# Altium PCB PCB1 (1).PcbDoc
Units mm, origin at the board's own origin, x right, y up, seen from the top; angles counter-clockwise.
Board outline 48 x 32 mm, 2 copper layers (Top Layer, Bottom Layer); 14 components, 7 nets, 32 pads, 0 vias.
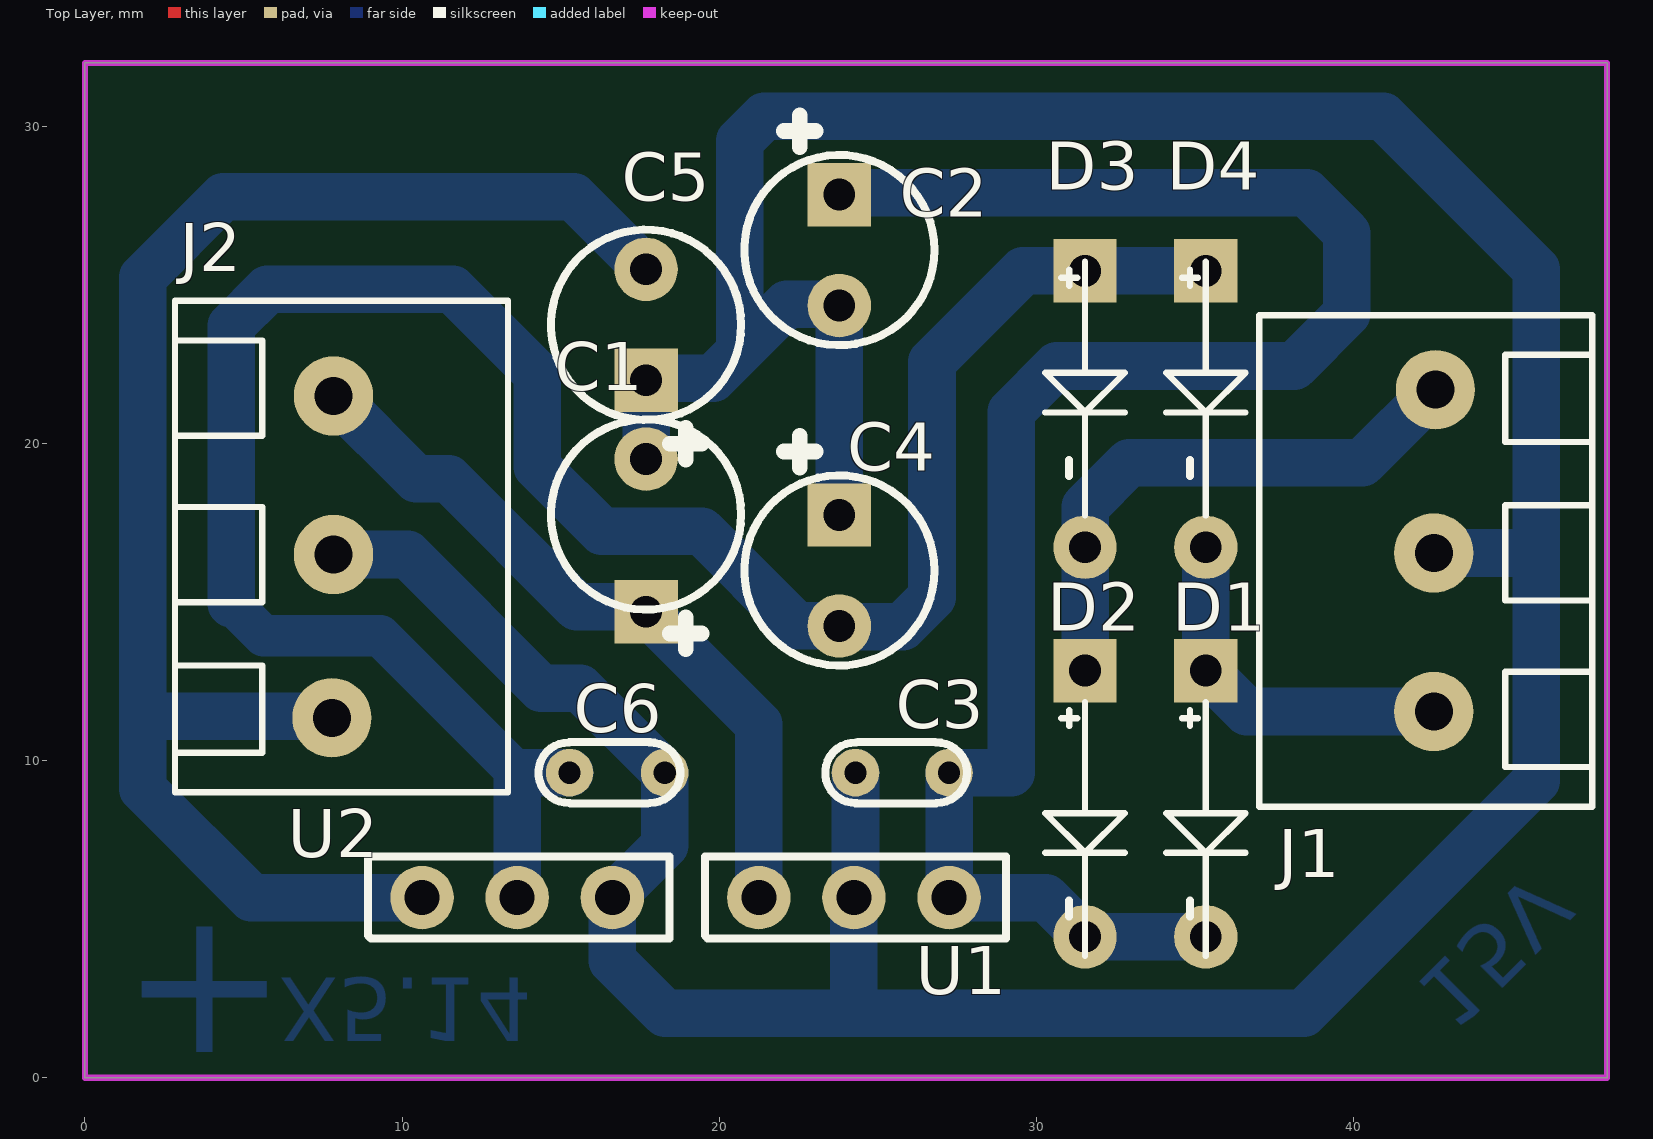
[diagram p0: Top Layer view]
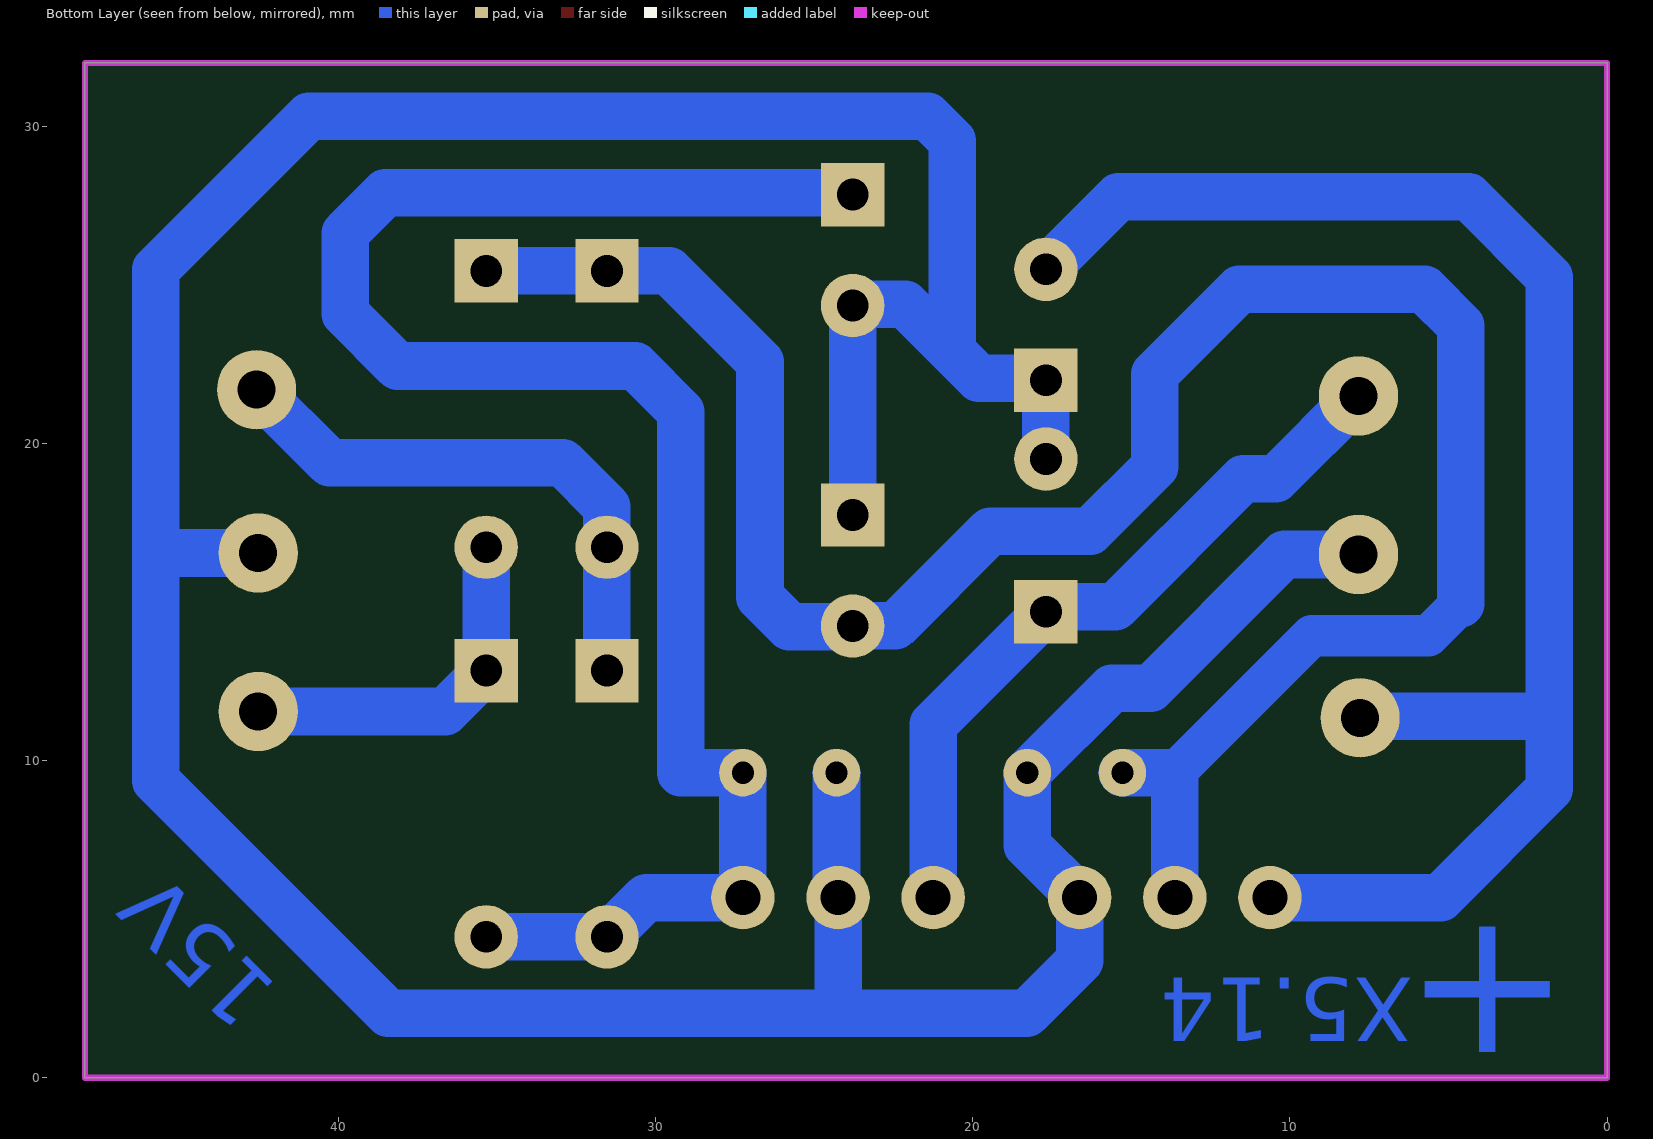
[diagram p1: Bottom Layer view, seen from below]
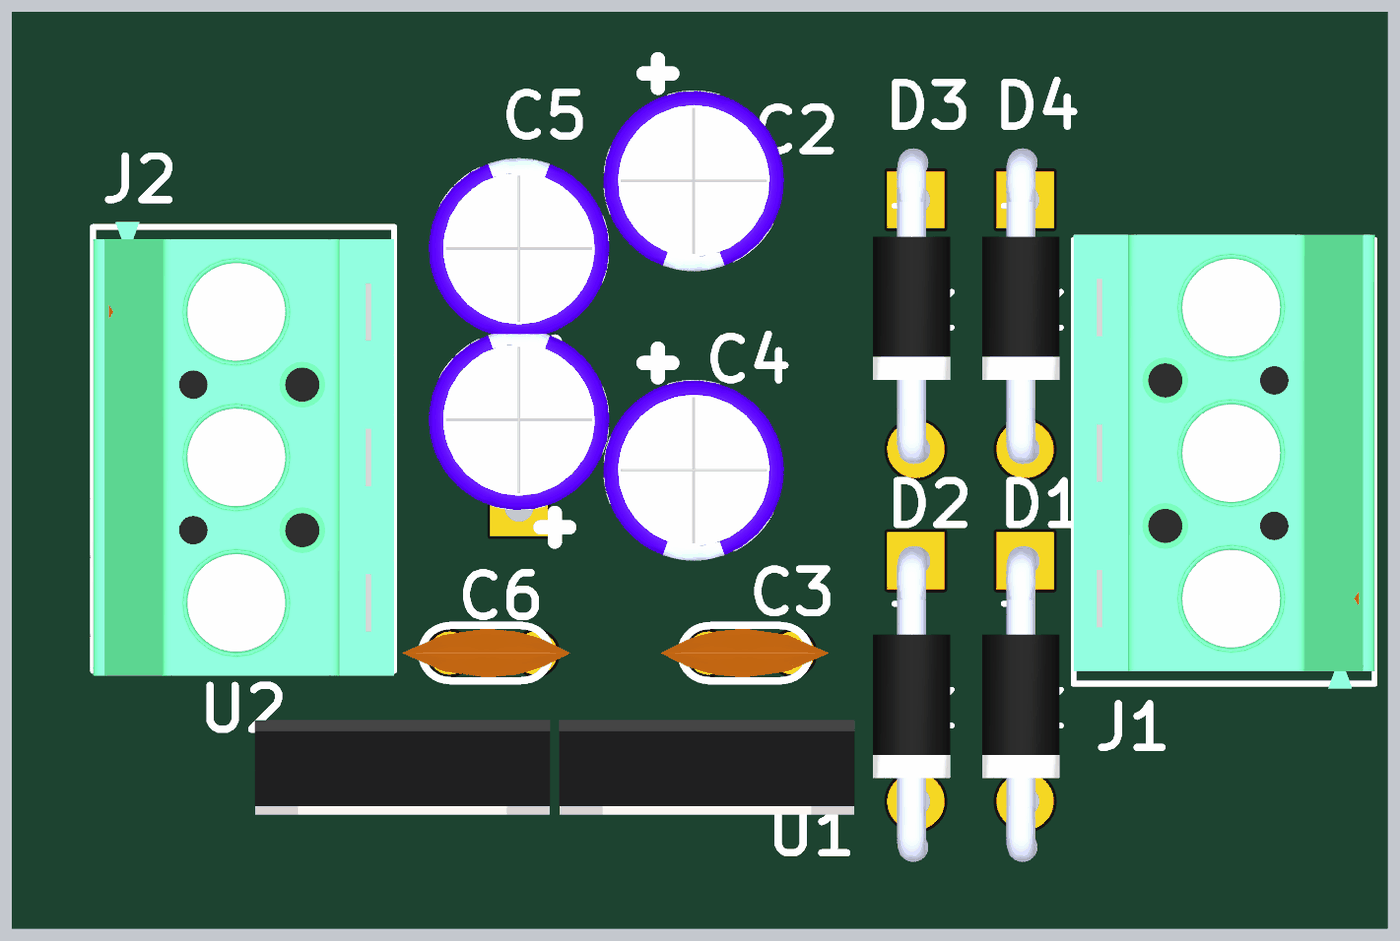
[diagram p2: 3D render of the assembled board from above, using the file's embedded part models]

## Layer stack, top to bottom
Top Solder: solder mask 0.0102, Solder Resist, Dk 3.5
Top Layer: signal copper 0.0356
Dielectric 1: dielectric 0.32, FR-4, Dk 4.8
Bottom Layer: signal copper 0.0356
Bottom Solder: solder mask 0.0102, Solder Resist, Dk 3.5

## Board outline
0,0 0,32 48,32 48,0

## Design rules (kind name [scope] priority, off if disabled: settings)
Clearance [All] p1: gap=0.5 ignorepadtopadclearanceinfootprint=FALSE except(0: Arc-Hole Track-Hole SMDPad-Hole THPad-Hole Via-Hole Fill-Hole Poly-Hole Region-Hole Text-Hole)
PolygonConnect [All] p1: connectstyle=Relief reliefconductorwidth=0.254 reliefentries=4 polygonreliefangle="90 Angle" airgapwidth=0.254
RoutingVias [All] p1: holewidth=0.711 width=1.27 viastyle="Through Hole" minholewidth=0.711 minwidth=1.27 maxholewidth=0.711 maxwidth=1.27
SolderMaskExpansion [All] p1: expansion=0.102 istentingtop=FALSE
Width [All] p1: maxlimit=5 minlimit=0.5 preferedwidth=5
30 further rules are at their usual default settings.

## Classes and differential pairs
component class Sheet1: C2 C3 C4 C5 D1 D2 D3 D4 J1 U1 U2

## Components (designator, comment, footprint, x,y, rotation, side; value= is the part's Value field where it differs from the comment)
C1 "1 uF" capacitor_elec_t/h_5mm#1 17.695,19.509 r270 top
C2 "4700uF" capacitor_elec_t/h_5mm#2 23.791,24.349 r90 top
C3 "0.1 uF" "tu gom"#1 25.569,9.617 r180 top
C4 "4700uF" capacitor_elec_t/h_5mm#2 23.791,14.245 r90 top
C5 "1uF" capacitor_elec_t/h_5mm#2 17.695,25.492 r270 top
C6 "0.1uF" "tu gom"#2 16.552,9.617 r0 top
D1 "diod_1N4007" diode_t/h_1N4007#1 35.348,7.839 r270 top
D2 "diod_1N4007" diode_t/h_1N4007#1 31.538,7.839 r270 top
D3 "diod_1N4007" diode_t/h_1N4007#2 31.538,21.729 r270 top
D4 "diod_1N4007" diode_t/h_1N4007#2 35.348,21.729 r270 top
J1 "domino_3pin" domino_3pin_5.08mm 42.587,16.697 r90 top
J2 "domino_3pin" domino_3pin_5.08mm 7.789,16.348 r270 top
U1 "LM7815" LM7812 24.251,5.68 r180 top
U2 "LM7915" LM7915 13.631,5.68 r180 top

## Footprints (in the part's own frame and the unit in brackets; to place one, negate y for a bottom-side part, rotate by r counter-clockwise, add the part's x,y. Pads: shape width x height; smd on the part's side, far side on the other; paste and mask are expansions set on the pad)
capacitor_elec_t/h_5mm#1 [mm]
  rect 2x2 hole 1: 1(4.812,0)
  round 2 hole 1: 2(0,0)
  silkscreen extent -1.25,-3 6,3, body extent -1.4,-3.15 4.91,3.15, height 12
capacitor_elec_t/h_5mm#2 [mm]
  rect 2x2 hole 1: 1(3.5,0)
  round 2 hole 1: 2(0,0)
  silkscreen extent -1.25,-3 6,3, body extent -1.4,-3.15 4.91,3.15, height 12
diode_t/h_1N4007#1 [mm]
  rect 2x2 hole 1: 1(-5,0)
  round 2 hole 1: 2(3.398,0)
  silkscreen extent -4,-1.25 4,1.25, body extent -5.51,-1.5 5.51,1.2, height 2.78
diode_t/h_1N4007#2 [mm]
  rect 2x2 hole 1: 1(-3.712,0)
  round 2 hole 1: 2(5,0)
  silkscreen extent -4,-1.25 4,1.25, body extent -5.51,-1.5 5.51,1.2, height 2.78
domino_3pin_5.08mm [mm]
  round 2.5 hole 1.2: 1(-5.15,0.05) 2(-0.15,0.05) 3(5,0)
  silkscreen extent -8.15,-4.95 7.35,5.55, body extent -8.32,-4.95 7.52,5.55, height 19.5
LM7812 [mm]
  round 2 hole 1.1: 1(-3,0) 2(0,0) 3(3,0)
  silkscreen extent -4.8,-1.3 4.7,1.29, body extent -5.15,-1.6 5.15,1.7, height 19.6
LM7915 [mm]
  round 2 hole 1.1: 1(-3,0) 2(0,0) 3(3,0)
  silkscreen extent -4.8,-1.3 4.7,1.29, body extent -5.15,-1.6 5.15,1.7, height 19.6
"tu gom"#1 [mm] "Tu gom mini"
  round 1.5 hole 0.7: 1(-1.682,0) 2(1.27,0)
  silkscreen extent -2.25,-0.97 2.22,0.97, body extent -2.92,-0.85 2.92,0.85, height 6.12
"tu gom"#2 [mm] "Tu gom mini"
  round 1.5 hole 0.7: 1(-1.27,0) 2(1.73,0)
  silkscreen extent -2.25,-0.97 2.22,0.97, body extent -2.92,-0.85 2.92,0.85, height 6.12

## Part data
C1 C2 C4 C5: library part capacitor_electric, "capacitor_electric"
C3 C6: library part "Tu gom 223 50V", "C?m"
U1: library part LM7812, "LM7812"

## Nets (pads, with @x,y where several pads share a name; then routed paths per layer and width w, separated by ;. In a path a pad name is that pad's centre, name@x,y a point inside that pad or via, vN(x,y) a via of type N, cw(c..) or ccw(c..) an arc to the next point about the centre after c; other vN are vias at no path point)
GND: C1.2 C2.2 C3.2 C4.1 C5.1 C6.2 J1.2 J2.2 U1.2 U2.1 | length 130.1
  Bottom Layer w1.5: J2.2 10.179,16.498 14.393,12.284 15.615,12.284 C6.2 18.282,7.331 U2.1 16.631,3.696 18.295,2.032 24.251,2.032 ; C1.2 C5.1 ; C5.1@17.695,22.063 19.812,22.063 22.133,24.384 23.756,24.384 C2.2 C4.1 ; 20.655,22.906 20.655,29.545 21.428,30.318 40.936,30.318 45.762,25.492 45.762,16.221 ; C3.2 24.299,5.68 24.251,5.632 24.251,2.032 ; J1.2 45.436,16.547 45.762,16.221 ; 24.251,2.032 38.431,2.032 45.762,9.363 45.762,16.221
NetC1_1: C1.1 J2.1 U1.3 | length 23.2
  Bottom Layer w1.5: J2.1 10.449,18.888 11.472,18.888 15.513,14.847 17.545,14.847 21.251,11.141 U1.3
NetC5_2: C5.2 J2.3 U2.3 | length 50.2
  Bottom Layer w1.5: J2.3@7.789,11.395 1.82,11.395 ; U2.3 5.249,5.68 1.82,9.109 1.82,11.395 ; C5.2 15.409,27.778 4.36,27.778 1.82,25.238 1.82,11.395
NetD1_1: D1.1 D4.2 J1.1 | length 11.6
  Bottom Layer w1.5: D4.2 D1.1 36.64,11.547 J1.1
NetD2_1: D2.1 D3.2 J1.3 | length 17.7
  Bottom Layer w1.5: D2.1 D3.2 31.538,17.999 32.935,19.396 40.286,19.396 J1.3
VIN_U1: C2.1 C3.1 D1.2 D2.2 U1.1 | length 56.8
  Bottom Layer w1.5: C2.1@23.791,27.905 38.523,27.905 39.793,26.635 39.793,24.095 38.142,22.444 30.649,22.444 29.208,21.003 29.208,9.617 C3.1 U1.1 30.299,5.68 D2.2 D1.2
VIN_U2: C4.2 C6.1 D3.1 D4.1 U2.2 | length 72.1
  Bottom Layer w1.3: 4.614,14.951 5.63,13.935 9.313,13.935 13.631,9.617
  Bottom Layer w1.5: 4.614,14.951 4.614,23.714 5.757,24.857 11.599,24.857 14.266,22.19 14.266,19.269 16.298,17.237 19.45,17.237 22.442,14.245 C4.2 ; U2.2 13.631,9.617 C6.1 ; C4.2@23.534,14.224 25.781,14.224 26.712,15.155 26.712,22.571 29.582,25.441 D3.1 D4.1

## Keep-outs
Keep-Out Layer:
  the board outline again, w0.2

## Other copper
Bottom Layer:
  text "X5.14" at 6.115,3.156 h2 r180
  text "15V" at 41.841,2.794 h2 r225
  text "+" at 1.127,0.802 h5